# Altium PCB 280049 tester board.PcbDoc
Units mm, origin at the board's own origin, x right, y up, seen from the top; angles counter-clockwise.
Board outline 176.02 x 265.66 mm, 4 copper layers (Top Layer, Layer 1, Layer 2, Bottom Layer), stack 1.57 mm thick; 108 components, 81 nets, 439 pads, 40 vias.
Unrouted connection lines stored in the file: 13.
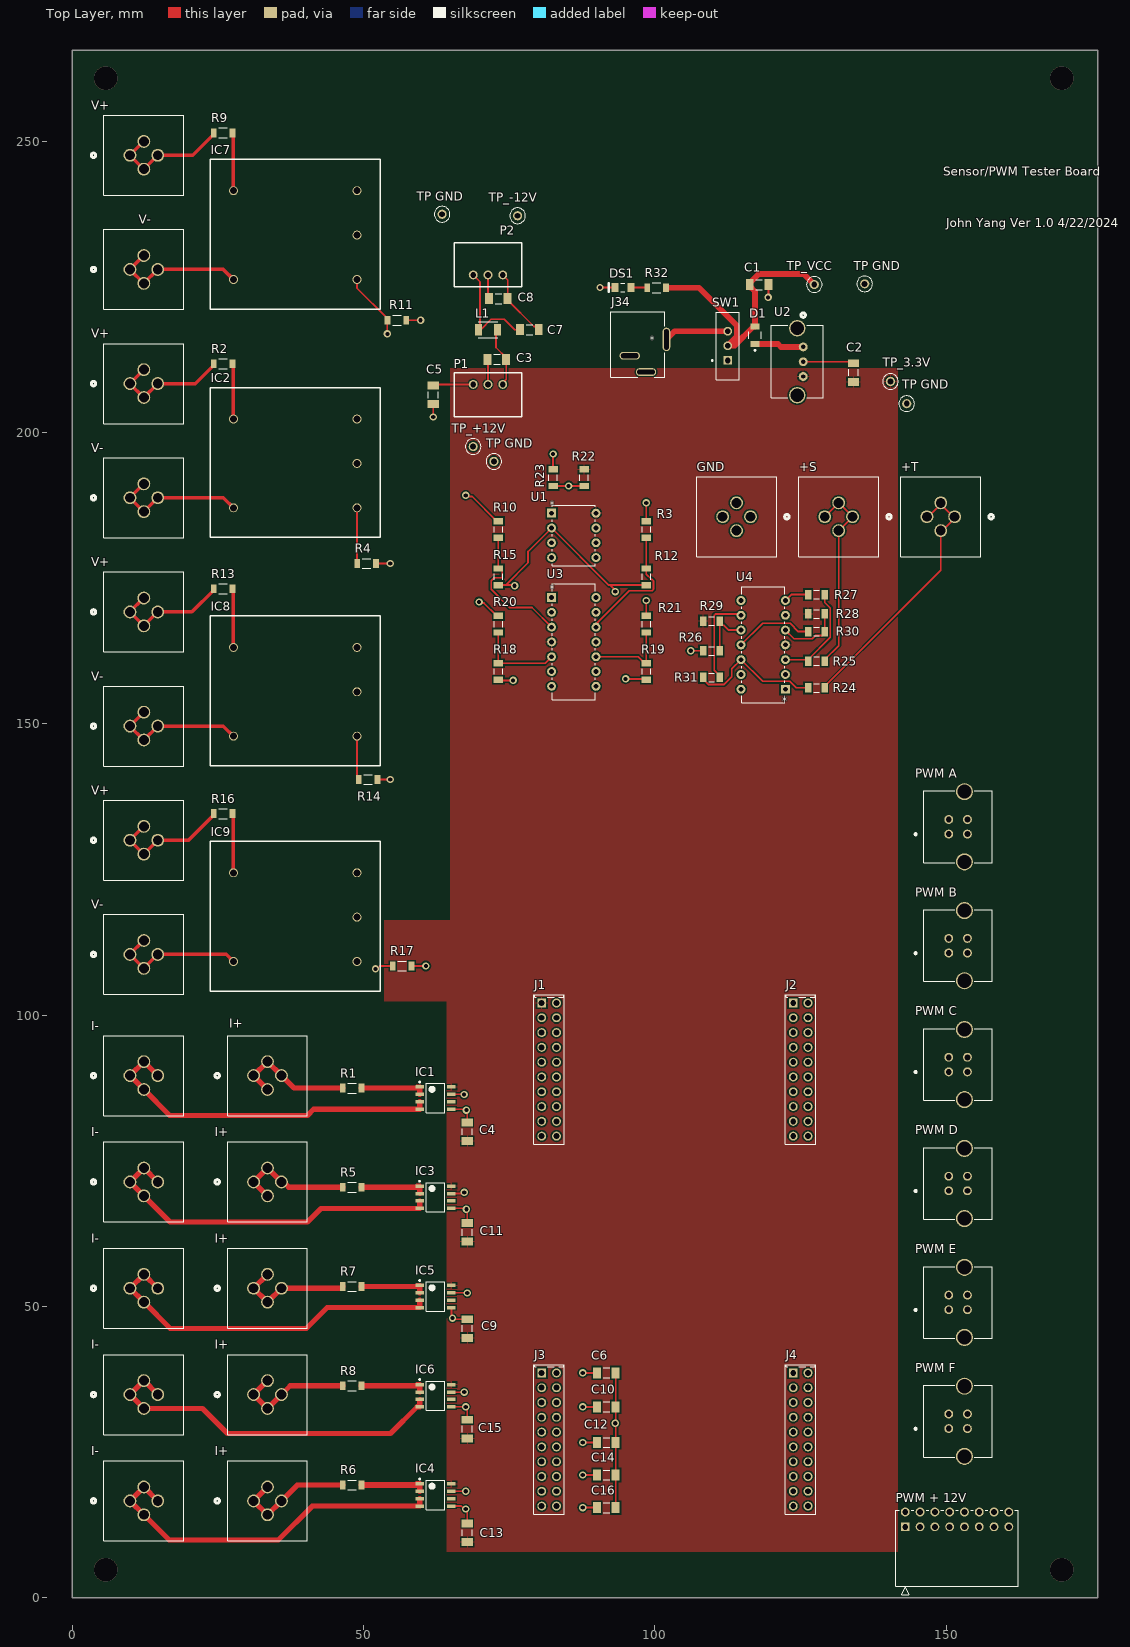
[diagram p0: Top Layer view]
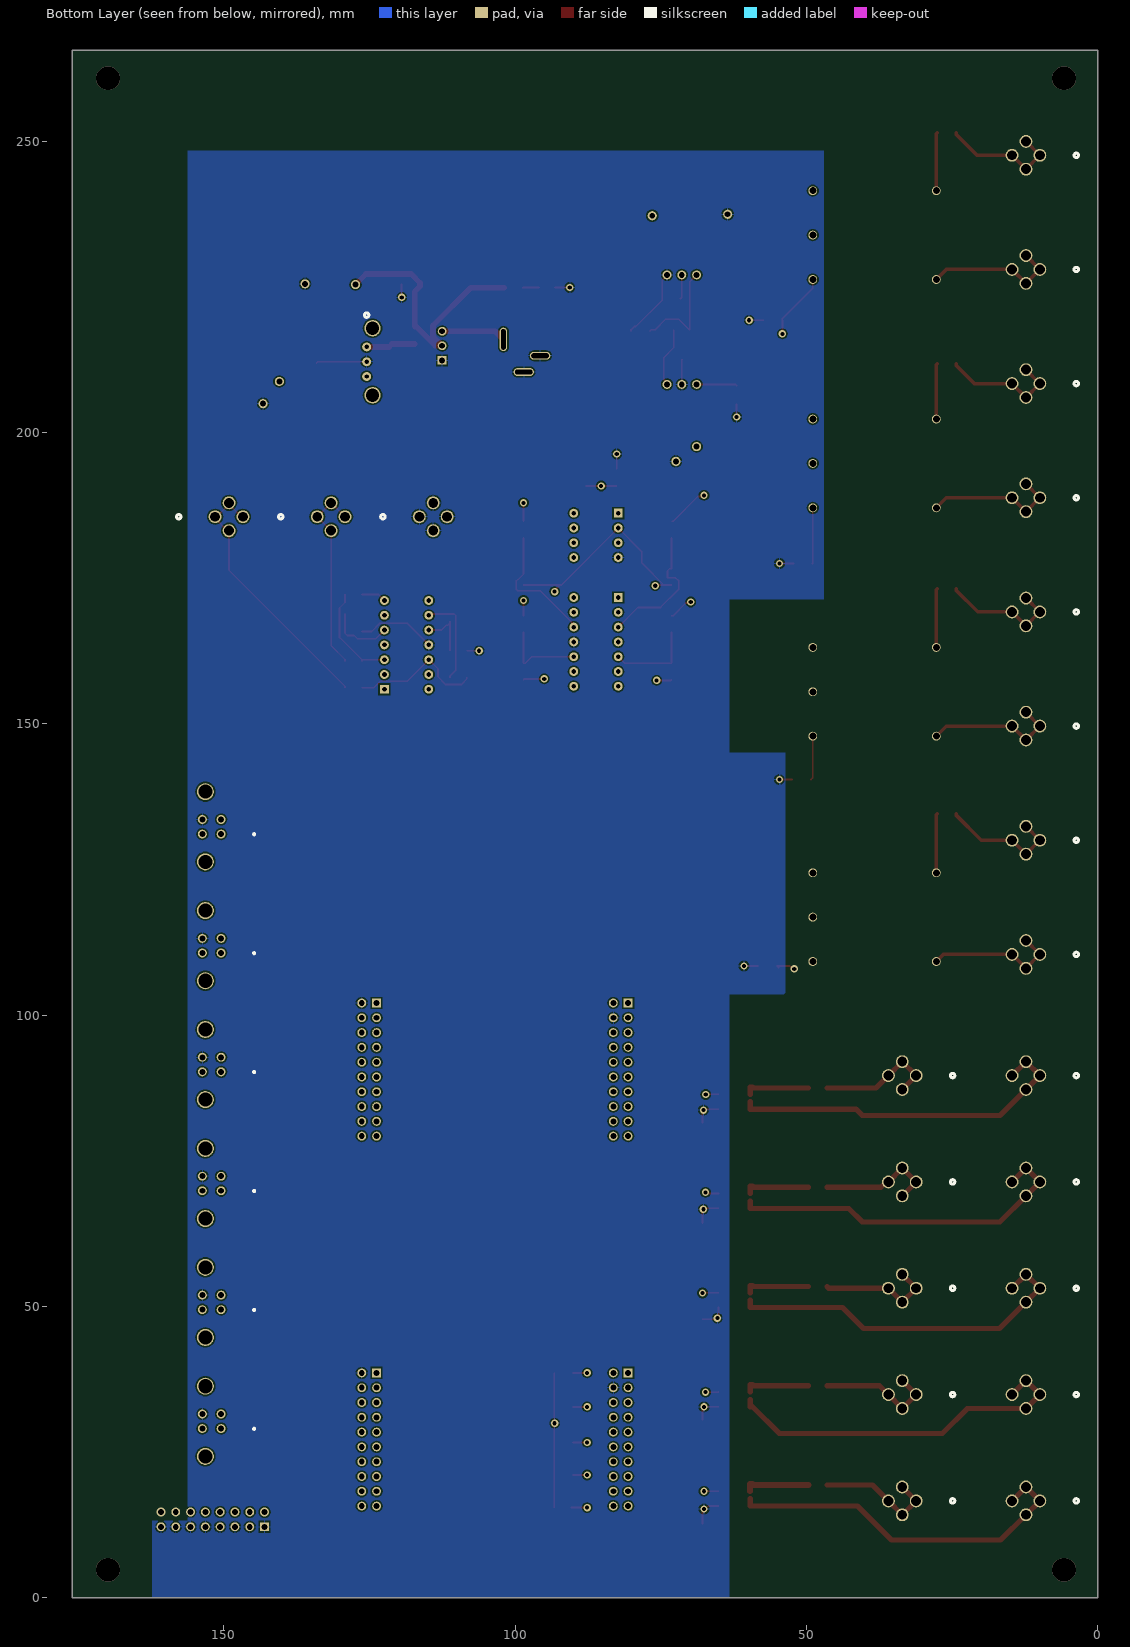
[diagram p1: Bottom Layer view, seen from below]
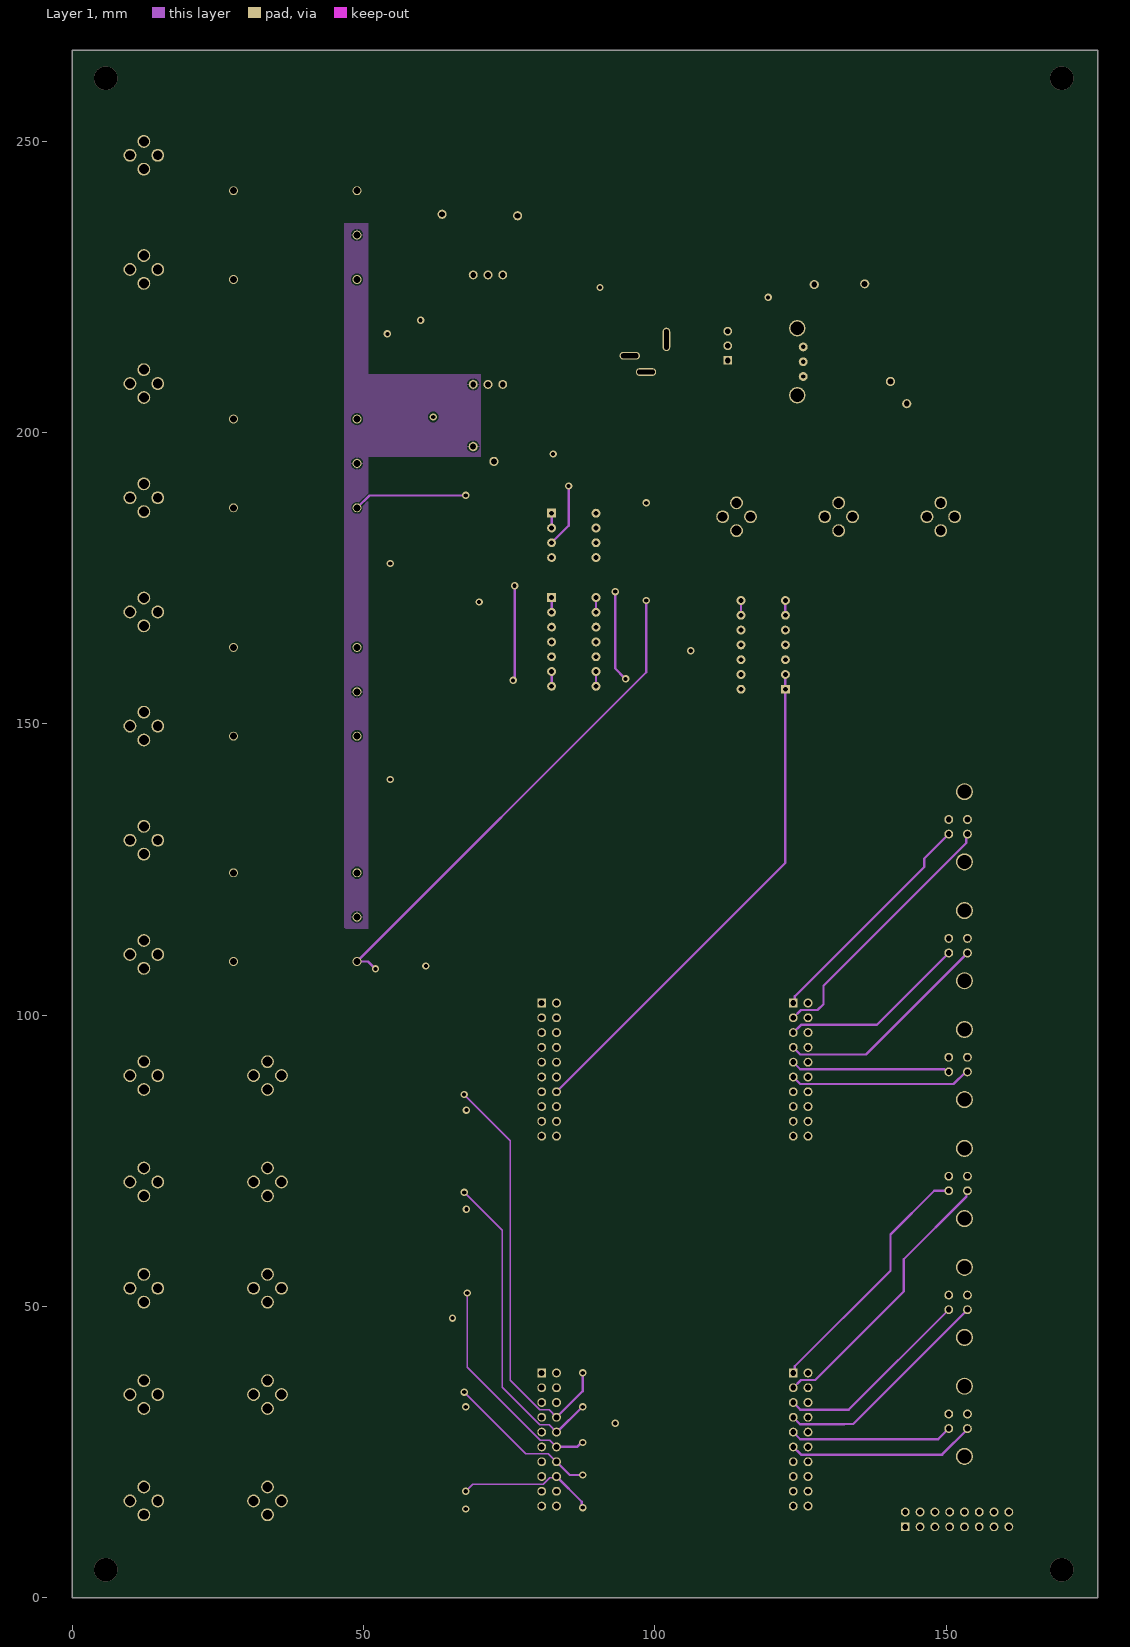
[diagram p2: Layer 1]
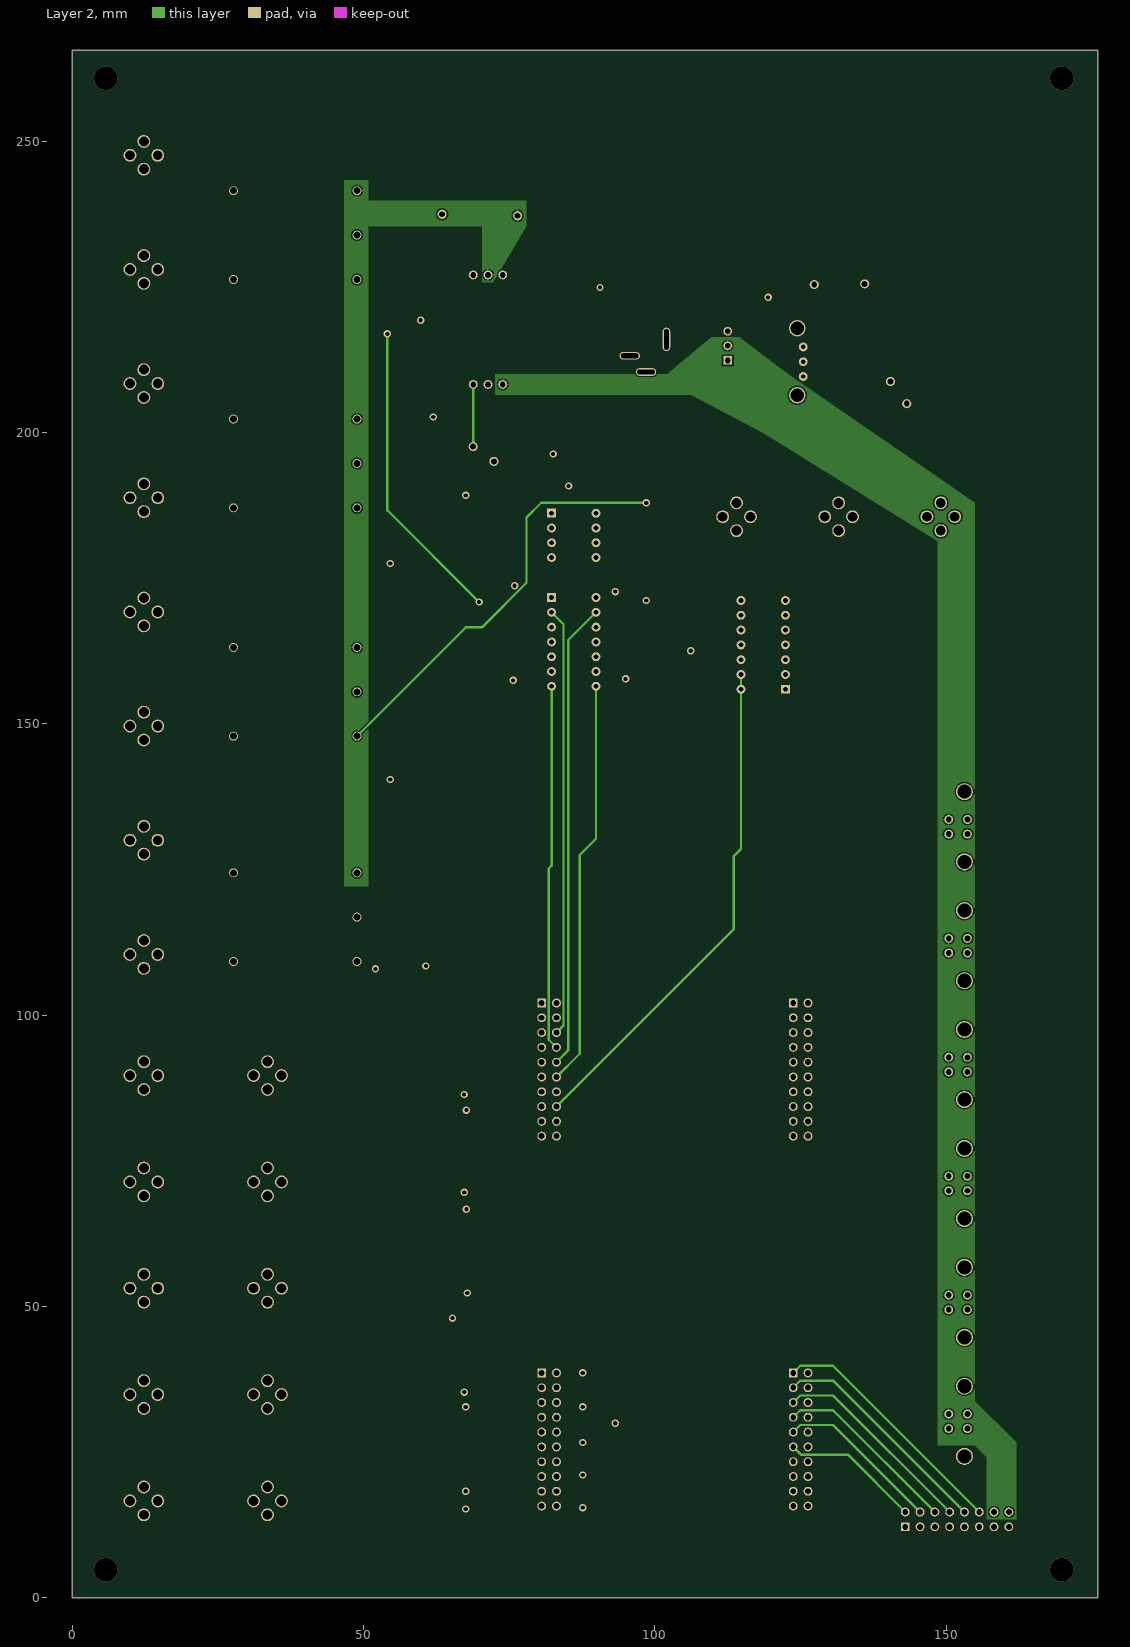
[diagram p3: Layer 2]

## Layer stack, top to bottom
Top Solder: solder mask 0.0305, Solder Resist, Dk 3.8
Top Layer: signal copper 0.035
Dielectric 2: prepreg 0.2, PP-006, Dk 4.4
Layer 1: signal copper 0.0175
Dielectric 1: dielectric 1.065, FR-4, Dk 4.6
Layer 2: signal copper 0.0175
Dielectric 3: prepreg 0.2, PP-006, Dk 4.4
Bottom Layer: signal copper 0.035
Bottom Solder: solder mask 0.0305, Solder Resist, Dk 3.8

## Board outline
0,0 176.022,0 176.022,265.659 0,265.659

## Design rules (kind name [scope] priority, off if disabled: settings)
Clearance [All] p1: gap=0.254 ignorepadtopadclearanceinfootprint=FALSE
PolygonConnect [All] p1: connectstyle=Relief reliefconductorwidth=0.254 reliefentries=4 polygonreliefangle="90 Angle" airgapwidth=0.254
RoutingVias [All] p1: holewidth=0.711 width=1.27 viastyle="Through Hole" minholewidth=0.711 minwidth=1.27 maxholewidth=0.711 maxwidth=1.27
SilkToSolderMaskClearance [IsPad] p1: minsilkscreentomaskgap=0.127 clearancetoexposedcopper=TRUE
SolderMaskExpansion [All] p1: expansion=0.102 istentingtop=FALSE
Width [All] p1: maxlimit=1 minlimit=0.254 preferedwidth=0.4 toplayer_prefwidth=0.3 bottomlayer_prefwidth=0.3 minimp=50.000000 maximp=50.000000 favimp=50.000000
29 further rules are at their usual default settings.

## Components (designator, comment, footprint, x,y, rotation, side; value= is the part's Value field where it differs from the comment)
+S "CT3151V1-0" CON4_CT3151V1-0_CTE#1 133.96,185.572 r180 top (schematic designator J39)
+T "CT3151V1-0" CON4_CT3151V1-0_CTE#2 151.486,185.572 r180 top (schematic designator J33)
C1 "1206" CAPC1206(3216)130_M 117.907,225.425 r0 top value=47nF
C2 "1206" CAPC1206(3216)130_M 134.112,210.312 r270 top value=47nF
C3 "1206" CAPC1206(3216)130_M 72.898,212.598 r0 top value=47nF
C4 "47nF 1206" CAPC1206(3216)130_M 67.818,80.01 r270 top value=47nF
C5 "1206" CAPC1206(3216)130_M 61.976,206.502 r270 top value=47nF
C6 "1206" CAPC1206(3216)130_M 91.694,38.608 r0 top value=47nF
C7 "1206" CAPC1206(3216)130_M 78.486,217.678 r0 top value=47nF
C8 "1206" CAPC1206(3216)130_M 73.152,223.012 r0 top value=47nF
C9 "47nF 1206" CAPC1206(3216)130_M 67.818,46.228 r270 top value=47nF
C10 "1206" CAPC1206(3216)130_M 91.694,32.766 r0 top value=47nF
C11 "47nF 1206" CAPC1206(3216)130_M 67.818,62.738 r270 top value=47nF
C12 "1206" CAPC1206(3216)130_M 91.694,26.67 r0 top value=47nF
C13 "47nF 1206" CAPC1206(3216)130_M 67.818,11.176 r270 top value=47nF
C14 "1206" CAPC1206(3216)130_M 91.694,21.082 r0 top value=47nF
C15 "47nF 1206" CAPC1206(3216)130_M 67.818,28.956 r270 top value=47nF
C16 "1206" CAPC1206(3216)130_M 91.694,15.494 r0 top value=47nF
D1 "1206 D" FP-SD1206S-MFG 117.221,216.738 r90 top value=115pF
DS1 "1206 LED" LUMX-SML-LX1206YC-TR_V 94.539,224.917 r180 top
GND "CT3151V1-0" CON4_CT3151V1-0_CTE#1 116.434,185.572 r180 top (schematic designator J41)
I+ "CT3151V1-0" CON4_CT3151V1-0_CTE#1 31.144,16.642 r0 top (schematic designator J23)
I+ "CT3151V1-0" CON4_CT3151V1-0_CTE#1 31.144,34.892 r0 top (schematic designator J21)
I+ "CT3151V1-0" CON4_CT3151V1-0_CTE#1 31.144,53.142 r0 top (schematic designator J19)
I+ "CT3151V1-0" CON4_CT3151V1-0_CTE#1 31.144,71.392 r0 top (schematic designator J17)
I+ "CT3151V1-0" CON4_CT3151V1-0_CTE#1 31.144,89.642 r0 top (schematic designator J5)
I- "CT3151V1-0" CON4_CT3151V1-0_CTE#1 9.915,16.642 r0 top (schematic designator J24)
I- "CT3151V1-0" CON4_CT3151V1-0_CTE#1 9.915,34.892 r0 top (schematic designator J22)
I- "CT3151V1-0" CON4_CT3151V1-0_CTE#1 9.915,53.142 r0 top (schematic designator J20)
I- "CT3151V1-0" CON4_CT3151V1-0_CTE#1 9.915,71.392 r0 top (schematic designator J18)
I- "CT3151V1-0" CON4_CT3151V1-0_CTE#1 9.915,89.642 r0 top (schematic designator J6)
IC1 "MLX91221KDC-ABR-020-RE" MLX91221KDC-ABR-020-RE 62.374,85.788 r0 top
IC2 "LV-20P" LV-20P 31.496,195.227 r90 top
IC3 "MLX91221KDC-ABR-020-RE" MLX91221KDC-ABR-020-RE 62.374,68.756 r0 top
IC4 "MLX91221KDC-ABR-020-RE" MLX91221KDC-ABR-020-RE 62.374,17.659 r0 top
IC5 "MLX91221KDC-ABR-020-RE" MLX91221KDC-ABR-020-RE 62.374,51.723 r0 top
IC6 "MLX91221KDC-ABR-020-RE" MLX91221KDC-ABR-020-RE 62.374,34.691 r0 top
IC7 "LV-20P" LV-20P 31.496,234.42 r90 top
IC8 "LV-20P" LV-20P 31.496,156.035 r90 top
IC9 "LV-20P" LV-20P 31.496,117.348 r90 top
J1 "1-826656-0" CON20_2X10_P100UM_HDR_TYC 80.594,102.108 r270 top
J2 "1-826656-0" CON20_2X10_P100UM_HDR_TYC 123.774,102.108 r270 top
J3 "1-826656-0" CON20_2X10_P100UM_HDR_TYC 80.594,38.608 r270 top
J4 "1-826656-0" CON20_2X10_P100UM_HDR_TYC 123.774,38.608 r270 top
J34 "KLDVX-0202-A" JACK_KLDVX-0202_KYC 97.104,215.113 r0 top
L1 "1210" TDK-NLV32-PF_V 71.374,217.678 r0 top
P1 "lms78_12-0.5r" lms78_12-0.5r 76.031,209.391 r180 top
P2 "lms78_12-0.5r" lms78_12-0.5r 66.717,225.965 r0 top
"PWM + 12V" "PPPC082LJBN-RC" CONN_PPPC082LJBN-RC_SUL 143.002,12.192 r180 top (schematic designator J40)
"PWM A" "PWM A" CONN4_5787834-1_TEC 153.675,133.604 r90 top (schematic designator J7)
"PWM B" "PWM B" CONN4_5787834-1_TEC 153.675,113.194 r90 top (schematic designator J8)
"PWM C" "PWM C" CONN4_5787834-1_TEC 153.675,92.783 r90 top (schematic designator J9)
"PWM D" "PWM D" CONN4_5787834-1_TEC 153.675,72.373 r90 top (schematic designator J12)
"PWM E" "PWM E" CONN4_5787834-1_TEC 153.675,51.963 r90 top (schematic designator J13)
"PWM F" "PWM F" CONN4_5787834-1_TEC 153.675,31.552 r90 top (schematic designator J14)
R1 "RC1206JR-070RL" FP-RC1206-MFG 48.04,87.5 r0 top value=0Ω
R2 "RC1206JR-070RL" FP-RC1206-MFG 25.908,211.836 r0 top value=0Ω
R3 "1206" RESC3216X70X50NL05T20 98.552,183.388 r90 top
R4 "RC1206JR-070RL" FP-RC1206-MFG 50.546,177.546 r0 top value=0Ω
R5 "RC1206JR-070RL" FP-RC1206-MFG 48.04,70.468 r0 top value=0Ω
R6 "RC1206JR-070RL" FP-RC1206-MFG 48.04,19.371 r0 top value=0Ω
R7 "RC1206JR-070RL" FP-RC1206-MFG 48.04,53.436 r0 top value=0Ω
R8 "RC1206JR-070RL" FP-RC1206-MFG 48.04,36.403 r0 top value=0Ω
R9 "RC1206JR-070RL" FP-RC1206-MFG 25.908,251.46 r0 top value=0Ω
R10 "1206" RESC3216X70X50NL05T20 73.152,183.388 r270 top
R11 "RC1206JR-070RL" FP-RC1206-MFG 55.753,219.304 r0 top value=0Ω
R12 "1206" RESC3216X70X50NL05T20 98.552,175.26 r90 top
R13 "RC1206JR-070RL" FP-RC1206-MFG 25.908,173.228 r0 top value=0Ω
R14 "RC1206JR-070RL" FP-RC1206-MFG 50.8,140.462 r0 top value=0Ω
R15 "1206" RESC3216X70X50NL05T20 73.152,175.26 r90 top
R16 "RC1206JR-070RL" FP-RC1206-MFG 25.908,134.62 r0 top value=0Ω
R17 "RC1206JR-070RL" FP-RC1206-MFG 56.642,108.458 r0 top value=0Ω
R18 "1206" RESC3216X70X50NL05T20 73.152,159.004 r270 top
R19 "1206" RESC3216X70X50NL05T20 98.552,159.004 r270 top
R20 "1206" RESC3216X70X50NL05T20 73.152,167.132 r270 top
R21 "1206" RESC3216X70X50NL05T20 98.552,167.132 r90 top
R22 "1206" RESC3216X70X50NL05T20 87.884,192.278 r270 top
R23 "1206" RESC3216X70X50NL05T20 82.55,192.278 r270 top
R24 "1206" RESC3216X70X50NL05T20 127.762,156.21 r0 top
R25 "1206" RESC3216X70X50NL05T20 127.762,160.782 r180 top
R26 "1206" RESC3216X70X50NL05T20 109.728,157.988 r180 top
R27 "1206" RESC3216X70X50NL05T20 127.762,172.212 r0 top
R28 "1206" RESC3216X70X50NL05T20 127.762,168.91 r0 top
R29 "1206" RESC3216X70X50NL05T20 109.728,167.64 r0 top
R30 "1206" RESC3216X70X50NL05T20 127.762,165.862 r0 top
R31 "1206" RESC3216X70X50NL05T20 109.728,162.56 r0 top
R32 "1206R" FP-RC1206-MFG 100.305,224.892 r180 top value=0Ω
SW1 "EG1218" ESWI-EG1218_V 112.522,214.915 r90 top
"TP GND" "5004" FP-5004-MFG 143.256,204.978 r270 top (schematic designator J32)
"TP GND" "5004" FP-5004-MFG 136.042,225.552 r270 top (schematic designator J31)
"TP GND" "5004" FP-5004-MFG 63.5,237.49 r270 top (schematic designator J28)
"TP GND" "5004" FP-5004-MFG 72.39,195.072 r270 top (schematic designator J27)
TP_3.3V "5004" FP-5004-MFG 140.462,208.788 r270 top (schematic designator J11)
TP_+12V "5004" FP-5004-MFG 68.834,197.612 r270 top (schematic designator J30)
TP_-12V "5004" FP-5004-MFG 76.454,237.236 r270 top (schematic designator J29)
TP_VCC "5004" FP-5004-MFG 127.381,225.425 r270 top (schematic designator J10)
U1 "OP284EPZ" N_8_ADI 82.296,186.182 r0 top
U2 "TSR 1-4833WI" TSR1WI-SINGLE_TRP 125.476,214.719 r270 top
U3 "OP484FPZ" N_14_ADI 82.296,171.704 r0 top
U4 "OP484FPZ" N_14_ADI 122.428,155.956 r180 top
V+ "CT3151V1-0" CON4_CT3151V1-0_CTE#1 9.915,130.038 r0 top (schematic designator J37)
V+ "CT3151V1-0" CON4_CT3151V1-0_CTE#1 9.915,169.23 r0 top (schematic designator J35)
V+ "CT3151V1-0" CON4_CT3151V1-0_CTE#1 9.915,247.615 r0 top (schematic designator J25)
V+ "CT3151V1-0" CON4_CT3151V1-0_CTE#1 9.915,208.423 r0 top (schematic designator J15)
V- "CT3151V1-0" CON4_CT3151V1-0_CTE#1 9.915,110.442 r0 top (schematic designator J38)
V- "CT3151V1-0" CON4_CT3151V1-0_CTE#1 9.915,149.634 r0 top (schematic designator J36)
V- "CT3151V1-0" CON4_CT3151V1-0_CTE#1 9.915,228.019 r0 top (schematic designator J26)
V- "CT3151V1-0" CON4_CT3151V1-0_CTE#1 9.915,188.827 r0 top (schematic designator J16)

## Footprints (in the part's own frame and the unit in brackets; to place one, negate y for a bottom-side part, rotate by r counter-clockwise, add the part's x,y. Pads: shape width x height; smd on the part's side, far side on the other; paste and mask are expansions set on the pad)
CAPC1206(3216)130_M [mm] "Chip Capacitor, Body 3.2x1.6mm, Height 1.3mm, IPC Low Density"
  rect 1.35x1.9 smd: 1(-1.6,0) 2(1.6,0)
  silkscreen extent -0.55,-0.85 0.55,0.85, body extent -1.7,-0.9 1.7,0.9, height 1.3
CON4_CT3151V1-0_CTE#1 [mil]
  round 87 hole 67 paste-99999 mask+5.91: 1(0,0) 2(188,0) 3(94,94) 4(94,-94)
  silkscreen extent -261,-270 364,270
CON4_CT3151V1-0_CTE#2 [mil]
  round 87 hole 67 paste-99999 mask+5.91: 1(0,0) 2(188,0) 4(94,-94)
  round 87 hole 67.01 paste-99999 mask+5.91: 3(94,94)
  silkscreen extent -261,-270 364,270
CON20_2X10_P100UM_HDR_TYC [mil]
  rect 60x60 hole 40 paste-99999 mask+3.94: 1(0,0)
  round 60 hole 40 paste-99999 mask+3.94: 2(0,100) 3(100,0) 4(100,100) 5(200,0) 6(200,100) 7(300,0) 8(300,100) 9(400,0) 10(400,100) 11(500,0) 12(500,100) 13(600,0) 14(600,100) 15(700,0) 16(700,100) 17(800,0) 18(800,100) 19(900,0) 20(900,100)
  silkscreen extent -55,-54 955,154, body extent -50,-50 950,150, height 374
CONN4_5787834-1_TEC [mil]
  round 60 hole 40 paste-99999 mask+3.94: 1(0,126.38) 2(-98.43,126.38) 3(-98.43,0) 4(0,0)
  round 115 hole 95 paste-99999 mask+3.94: 5(-286.21,20.19) 6(187.79,20.19)
  silkscreen extent -291,-167 193,354
CONN_PPPC082LJBN-RC_SUL [mil]
  rect 60x60 hole 40 paste-99999 mask+3.94: 1(0,0)
  round 60 hole 40 paste-99999 mask+3.94: 2(0,-100) 3(-100,0) 4(-100,-100) 5(-200,0) 6(-200,-100) 7(-300,0) 8(-300,-100) 9(-400,0) 10(-400,-100) 11(-500,0) 12(-500,-100) 13(-600,0) 14(-600,-100) 15(-700,0) 16(-700,-100)
  silkscreen extent -765,-113 65,458
ESWI-EG1218_V [mm] "THD, 3-Leads, Body 11.6x4mm, Pitch 2.5mm"
  rect 1.5x1.5 hole 1: 1(-2.5,0)
  round 1.5 hole 1: 2(0,0) 3(2.5,0)
  silkscreen extent -5.8,-2 5.8,2.77, body extent -5.8,-2 5.8,2, height 7.4
FP-5004-MFG [mm]
  round 1.57 hole 1.02 paste-2539.97 mask+0.1: 1(0,0)
  silkscreen extent -1.34,-1.35 1.34,1.35, body extent -1.45,-1.45 1.45,1.45, height 0.25
FP-RC1206-MFG [mm]
  rect 1x1.5 smd paste+0 mask+0: 1(-1.6,0) 2(1.6,0)
  silkscreen extent -0.72,-0.85 0.72,0.85, body extent -2.2,-0.95 2.2,0.95, height 0.25
FP-SD1206S-MFG [mm]
  rect 1x1.5 smd paste+0 mask+0: 1(-1.5,0) 2(1.5,0)
  silkscreen extent -2.72,-1.05 0.63,1.05, body extent -2.1,-1.15 2.1,1.15, height 0.25
JACK_KLDVX-0202_KYC [mil]
  oval 52x158 hole 32.01 slot 138 at 90 deg paste+0 mask+3.94: 1(192.91,35.4)
  oval 138x52 hole 32 slot 118 at 0 deg paste-99999 mask+3.94: 2(55.12,-185.07) 3(-55.12,-74.84)
  silkscreen extent -182,-222 182,222
lms78_12-0.5r [mil]
  round 60 hole 39.37: 1(83.35,43.74) 2(183.35,43.74) 3(283.35,43.74)
  silkscreen extent -45,-35 412,262
LUMX-SML-LX1206YC-TR_V [mm] "SMD, 2-Leads, Body 3.2x1.5mm"
  rect 1.2x1.5 smd: 1(-1.35,0) 2(1.35,0)
  silkscreen extent -0.35,-0.75 2.45,0.75, body extent -1.6,-0.75 1.6,0.75, height 1.25
LV-20P [mil]
  round 60 hole 47.24: 1(-320,150) 2(280,150) 3(-320,-685) 4(-20,-685) 5(280,-685)
  silkscreen extent -520,-842 493,307
MLX91221KDC-ABR-020-RE [mm] "SOIC, 8-Leads, Body 4.89x3.90mm, Pitch 1.27mm, IPC Medium Density"
  rect 1.45x0.6 smd: 1(-2.725,1.905) 2(-2.725,0.635) 3(-2.725,-0.635) 4(-2.725,-1.905) 5(2.725,-1.905) 6(2.725,-0.635) 7(2.725,0.635) 8(2.725,1.905)
  silkscreen extent -2.85,-2.5 1.6,2.88, body extent -2,-2.5 2,2.5, height 1.73
N_8_ADI [mil]
  rect 60x60 hole 32 paste-99999 mask+3.94: 1(0,0)
  round 60 hole 32 paste-99999 mask+3.94: 2(0,-100) 3(0,-200) 4(0,-300) 5(300,-300) 6(300,-200) 7(300,-100) 8(300,0)
  silkscreen extent 5,-355 295,55, body extent -5,-350 315,50, height 215
N_14_ADI [mil]
  rect 60x60 hole 32 paste-99999 mask+3.94: 1(0,0)
  round 60 hole 32 paste-99999 mask+3.94: 2(0,-100) 3(0,-200) 4(0,-300) 5(0,-400) 6(0,-500) 7(0,-600) 8(300,-600) 9(300,-500) 10(300,-400) 11(300,-300) 12(300,-200) 13(300,-100) 14(300,0)
  silkscreen extent 5,-692 295,92, body extent -5,-687 315,87, height 215
RESC3216X70X50NL05T20 [mm] "Chip Resistor, 2-Leads, Body 3.20x1.60mm, IPC Medium Density"
  rect 1.1x1.65 smd: 1(-1.425,0) 2(1.425,0)
  silkscreen extent -0.5,-0.72 0.5,0.72, body extent -1.63,-0.82 1.62,0.82, height 0.7
TDK-NLV32-PF_V [mm] "Molded Inductor, 2-Leads, Body 3.4x2.7mm"
  rect 1.2x2 smd: 1(-1.6,0) 2(1.6,0)
  silkscreen extent -1.7,-1.35 1.7,1.35, body extent -1.92,-1.35 1.92,1.35, height 2.4
TSR1WI-SINGLE_TRP [mil]
  round 60 hole 30 paste-99999 mask+3.94: 1(0,0) 2(100,0) 3(200,0)
  round 110 hole 90 paste-99999 mask+3.94: 4(-126.5,-40) 5(326.5,-40)
  silkscreen extent -230,-215 345,135

## Part data
+S +T GND I+ I+ I+ I+ I+ I- I- I- I- I- V+ V+ V+ V+ V- V- V- V-: library part CMP-010-000001-1, "No Description Available", Mfr_Name="CAL TEST ELECTRONICS", Copyright="Copyright (C) 2024 Ultra Librarian. All rights reserved.", Design Item ID=CT3151V1-0, Manufacturer_Part_Number=CT3151V1-0, RefDes=RefDes, Source=CT3151V1-0.SchLib, Type=DEV
C1 C2 C3 C5 C6 C7 C8 C10 C12 C14 C16: library part CMP-1037-04007-1, "CAP 47nF 200V ±10% 1206 (3216 Metric) Thickness 1.3mm SMD", Case-Metric=3216, Rated Voltage="200 V", Tolerance=Â±10%, Case-EIA=1206, Max Thickness="1.3 mm", Technology=SMT
C4 C9 C11 C13 C15: library part CMP-1037-04007-1, "CAP 47nF 200V ±10% 1206 (3216 Metric) Thickness 1.3mm SMD", Case-EIA=1206, Case-Metric=3216, Rated Voltage="200 V", Tolerance=Â±10%, Max Thickness="1.3 mm", Technology=SMT
D1: library part CMP-04549-000002-1, "DIODE SCHOTTKY 40V 2A 1206", Capacitance=115pF, Forward Current=2A, Manufacturer=AVX, Manufacturer Part Number=SD1206S040S2R0, Max Repetitive Reverse Voltage=40V, Max Surge Forward Current=40A, Package=SD1206S, Peak Reverse Current=0.03mA, Temperature="-55°C to +125°C", Temperature Range High=+125°C, Temperature Range Low=-55°C, Automotive=No, Category=Diode, ComponentLink2Description=Datasheet, ComponentLink2URL=http://datasheets.avx.com/schottky.pdf, Device Class L1="Discrete Semiconductors", Device Class L2=Diodes, Device Class L3="Schottky Diodes", Digikey Description="DIODE SCHOTTKY 40V 2A 1206", Height=1.16mm, Lead Free=Yes, Mouser Description="Small Signal Schottky Diode, Single, 40 V, 2 A, 500 Mv, 40 A, 125 C Rohs Compliant: Yes", Octopart=https://octopart.com/sd1206s040s2r0-avx-24931771, RoHS=TRUE
DS1: library part CMP-2000-07124-1, "Yellow LED, Water Clear Len, 585 nm, 2.1 V, -40 to 85 degC, 2-Pin SMD, RoHS, Tape and Reel", Color=Yellow, Current - Test=20mA, Lens Color=Colorless, Manufacturer=Lumex, Millicandela Rating=6mcd, Package / Case=1206(3216Metric), Package Description="2-Pin Surface Mount Device, Body 3.2 x 1.5 mm", Package Reference=SML-LX1206YC-TR, Standard Package=3,000, Supplier Device Package=1206, Voltage - Forward (Vf) (Typ)=2.1V, Catalog Drawings=SML-LX1206SeriesTopSML-LX1206SeriesSideSML-LX1206SeriesBottomSML-LX1206SeriesFootprint, Category=Optoelectronics, Datasheet URL=http://www.lumex.com/content/files/ProductAttachment/SML-LX1206YC-TR.pdf, Datasheet Version="Rev. K, 08/2012", Family=LEDIndication-Discrete, Features=-, Height (Max)=1.10mm, Lens Style/Size=RectanglewithFlatTop, Lens Transparency=Clear, Manufacturer URL=http://www.lumexinstruments.com/, Mounting Technology=SurfaceMount, Mounting Type=SurfaceMount, Online Catalog=SML-LX1206RectanglewithFlatTop1206PackageLEDs, Other Names=67-1358-2LU60357TRSMLLX1206YCTR, Packaging=Tape&Reel(TR), Product Training Modules=LEDsBenefitsofCustomLEDandLCDTechnology, RoHS Information=RoHSCertofCompliance, Series=-, Size / Dimension=3.20mmLx1.60mmW, Viewing Angle=160°, Wavelength - Dominant=-, Wavelength - Peak=585nm
IC1 IC3 IC4 IC5 IC6: library part CMP-031-00006-1, ".088 W", Design Item ID=MLX91221KDC-ABR-020-RE, Source=MLX91221KDC-ABR-020-RE.SchLib
IC2 IC7 IC8 IC9: "0.15 W"
J1 J2 J3 J4: library part CMP-012-000003-1, "No Description Available", Mfr_Name="TE Connectivity", Design Item ID=1-826656-0, RefDes=RefDes, Source=1-826656-0.SchLib, Type=Type
J34: "No Description Available", Mfr_Name="KYCON, INC.", RefDes=RefDes, Type="Power Connectors"
L1: library part CMP-2000-06854-1, "Wire Wound Inductor, 1 uH, +/- 5%, -40 to 105 degC, 2-Pin Molded, RoHS, Tape and Reel", Current Rating=400mA, DC Resistance (DCR)=700mOhmMax, Frequency - Self Resonant=120MHz, Frequency - Test=7.96MHz, Inductance=1µH, Manufacturer=TDK, Operating Temperature=-40°C~105°C, Package / Case=1210(3225Metric), Package Description="2-Pin Surface Mount Device, Body 3.2 x 2.5 mm", Package Reference=NLV32-PF, Q @ Freq=30@7.96MHz, Standard Package=1, Tolerance=±5%, Catalog Drawings="NLV32T,NLCV32TSeriesTop /  / NLV32T,NLCV32TSeriesSide /  / NLV32T,NLCV32TSeriesEnd", Category=Inductors,Coils,Chokes, Datasheet URL=https://product.tdk.com/info/en/catalog/datasheets/inductor_commercial_standard_nlv32-pf_en.pdf, Datasheet Version=09/2016, Dynamic Catalog=NLVSeries, Family=FixedInductors, Manufacturer URL=http://www.tdk.com/, Mounting Technology=SurfaceMount, Mounting Type=SurfaceMount, Other Names=445-1517-1, Packaging=CutTape(CT), Product Training Modules=SMDInductors, Series=NLV, Shielding=Unshielded, Size / Dimension="0.126\"Lx0.079\"Wx0.086\"H(3.20mmx2.50mmx2.20mm)"
"PWM + 12V": "No Description Available", Mfr_Name=Sullins, RefDes=RefDes, Type=Type
"PWM A" "PWM B" "PWM C" "PWM D" "PWM E" "PWM F": library part CONN_USB_TypeB, "USB TYPE B SINGLE VERTICAL", Color=Black, Contact Current Rating=1A, Flammability Rating="UL94 V-0", Insulation Resistance=1GR, Manufacturer="Adam Tech", Max Operating Temperature=185°C, Min Operating Temperature=-67°C, Package Quantity=144, Supplier Part Number 1=USB-B-S-VT, Voltage Rating=30V, Category="Audio / Video Connectors", Circuit Application=Signal, ComponentLink9Description="New link", ComponentLink9URL=https://www.digikey.com/en/products/detail/adam-tech/USB-B-S-VT/9829305?s=N4IgTCBcDa4AwFYDsBaAqgZQEIpxlAagCooByAIiALoC%2BQA, Connector System=Cable-to-Board, Connector Type=Receptacle, Contact Material="Copper Alloy,Copper", Contact Plating=Gold, Current Rating=1A, Depth=11.46mm, ELV=Compliant, Gender=Receptacle, Housing Color=Black, Housing Material=Thermoplastic, Insulation Color=Black, Lead Free="Lead Free", Length=12.03mm, Mount="Through Hole,Vertical", Number of Contacts=4, Number of Ports=1, Number of Positions=4, Number of Terminals/Pins=4, Orientation=Vertical, Packaging=Tray, PCB Thickness=1.57mm, Pitch=2.5mm, Plating=Bright,Tin, Plating Thickness=0.76um, Pricing 1="1=2.22000, 10=2.13000, 25=1.95280, 40=1.86400, 144=1.77521, 288=1.55333, 576=1.50894, 1008=1.33143 (USD)", Pricing 2="1=0.80860, 10=0.70270, 25=0.63690, 40=0.59390, 100=0.56400, 300=0.51060, 500=0.50550, 1000=0.43830 (USD)", Radiation Hardening=No, REACH SVHC="No SVHC", RoHS=Yes, RoHS Compliant=Yes, Series=B, Stock 1=1592, Stock 2=965, Supplier 1="Arrow Electronics", Tail Length=3.01mm, Termination="Through Hole", USB Standard="USB 2.0", Voltage Rating (AC)=30V
R1 R2 R4 R5 R6 R7 R8 R9 R11 R13 R14 R16 R17: library part CMP-2100-03681-2, "RES SMD 0 OHM JUMPER 1/4W 1206", Manufacturer=YAGEO, Package=RC1206, Power Rating=0.25W, Resistance=0Ω, Temperature="-55°C to +155°C", Temperature Coefficient=300ppm/°C, Temperature Range High=+155°C, Temperature Range Low=-55°C, Tolerance=5%, Voltage Rating=200V, Automotive=No, Category=Res, ComponentLink2Description=Datasheet, ComponentLink2URL=https://www.yageo.com/upload/media/product/productsearch/datasheet/rchip/PYu-RC_Group_51_RoHS_L_10.pdf, Composition="Thick Film", Device Class L1="Passive Components", Device Class L2=Resistors, Device Class L3="Chip SMD Resistors", Digikey Description="RES SMD 0 OHM JUMPER 1/4W 1206", Footprint Url=https://www.yageo.com/upload/website/yageo_PYu-R_Mount_10_19050818_343.pdf, Height=0.65mm, Ipc Land Pattern Name=RESC310160X55, Lead Free=Yes, Manufacturer Part Number=RC1206JR-070RL, Mouser Description="Resistor: thick film; SMD; 1206; 0O; 0.25W; ±5%; -55÷155°C", Octopart=https://octopart.com/rc1206jr-070rl-yageo-40025601, RoHS=TRUE, Series=RC
R3 R10 R12 R15 R18 R19 R20 R21 R22 R23 R24 R25 R26 R27 R28 R29 R30 R31: library part CMP-2003-00541-1, Manufacturer=Panasonic, Part Number=ERJ-8GEY0R00V
R32: library part CMP-2100-03681-2, "RES SMD 0 OHM JUMPER 1/4W 1206", Manufacturer=YAGEO, Manufacturer Part Number=RC1206JR-070RL, Package=RC1206, Power Rating=0.25W, Resistance=0Ω, Temperature="-55°C to +155°C", Temperature Coefficient=300ppm/°C, Temperature Range High=+155°C, Temperature Range Low=-55°C, Tolerance=5%, Voltage Rating=200V, Automotive=No, Category=Res, ComponentLink2Description=Datasheet, ComponentLink2URL=https://www.yageo.com/upload/media/product/productsearch/datasheet/rchip/PYu-RC_Group_51_RoHS_L_10.pdf, Composition="Thick Film", Device Class L1="Passive Components", Device Class L2=Resistors, Device Class L3="Chip SMD Resistors", Digikey Description="RES SMD 0 OHM JUMPER 1/4W 1206", Footprint Url=https://www.yageo.com/upload/website/yageo_PYu-R_Mount_10_19050818_343.pdf, Height=0.65mm, Ipc Land Pattern Name=RESC310160X55, Lead Free=Yes, Mouser Description="Resistor: thick film; SMD; 1206; 0O; 0.25W; ±5%; -55÷155°C", Octopart=https://octopart.com/rc1206jr-070rl-yageo-40025601, RoHS=TRUE, Series=RC
SW1: library part CMP-1696-00002-1, "Slide Switch, 500 V, -20 to 70 degC, 3-Pin THD, RoHS", Case\Package=SOT-23-5, Dropout Voltage="300 mV", Max Input Voltage="8 V", Max Operating Temperature="85 degC", Max Ouput Current="150 mA", Max Power Dissipation="250 mW", Min Input Voltage="4.3 V", Min Operating Temperature="-40 degC", Nominal Output Voltage="3.3 V", Package Quantity=3000, ComponentLink1Description="Manufacturer URL", ComponentLink1URL=http://www.e-switch.ch/en/, ComponentLink2Description=Datasheet, ComponentLink2URL=https://www.e-switch.com/system/asset/product_line/data_sheet/119/EG.pdf, DatasheetVersion=Oct-15, Height="1.3 mm", Length="3 mm", Mount="Surface Mount", Output Current="150 mA", Output Voltage="3.3 V", Outputs=1, PackageDescription="3-Pin Through Hole Device, Body 11.6 x 4 mm, Pitch 2.5 mm", PackageReference=EG1218, Packaging="Tape and Reel", Pins=5, Power Rating="250 mW", Radiation Hardening=No, REACH SVHC="No SVHC", RoHSCompliant=true, Width="1.8 mm"
"TP GND" "TP GND" "TP GND" "TP GND" TP_3.3V TP_+12V TP_-12V TP_VCC: library part CMP-2000-05575-2, "PC TEST POINT MINIATURE YELLOW", Manufacturer=Keystone, Automotive=No, Category=Conn, ComponentLink2Description=Datasheet, ComponentLink2URL=https://www.keyelco.com/product-pdf.cfm?p=1313, Contact Material=Silver, Device Class L1=Connectors, Device Class L2=unset, Device Class L3=unset, Digikey Description="PC TEST POINT MINIATURE YELLOW", Height=4.72mm, Is Female=yes, Lead Free=Yes, Manufacturer Part Number=5004, Mouser Description="TEST POINT PC MINI .040\"D YELLOW", Number of Contacts=1, Octopart=https://octopart.com/5004-keystone-28591, Package=5004, RoHS=TRUE
U1 U3 U4: "No Description Available", Mfr_Name="Analog Devices Inc", RefDes=RefDes, Type=Type
U2: library part CMP-01539-104759532-1, "TSR 1-4833WI DC-DC Converter, POL, Industrial, Encapsulated, 1A, 3.3V Out, 9-72V In", Output Power=3.3W, NexarPartId=104759532

## Via types
v1: diameter 1.27, hole 0.711, Top Layer to Bottom Layer, 36 vias
v2: diameter 4.064, hole 4.064, Top Layer to Bottom Layer, 4 vias

## Nets (pads, with @x,y where several pads share a name; then routed paths per layer and width w, separated by ;. In a path a pad name is that pad's centre, name@x,y a point inside that pad or via, vN(x,y) a via of type N, cw(c..) or ccw(c..) an arc to the next point about the centre after c; other vN are vias at no path point)
+3.3V: C2.2 C4.2 C9.2 C11.2 C13.2 C15.2 IC1.8 IC3.8 IC4.8 IC5.8 IC6.8 J1.1 R22.1 R28.1 R29.1 TP_3.3V.1 U1.8 U2.3 U3.4 U4.4
+12V: C5.1 IC2.4 IC7.4 IC8.4 IC9.4 P1.3 TP_+12V.1 | length 17.6
  Top Layer w0.3: C5.1 62.154,208.28 P1.3
  Layer 2 w0.4: TP_+12V.1 P1.3
+12VDC: "PWM + 12V.14" "PWM + 12V.16" "PWM A.1" "PWM B.1" "PWM C.1" "PWM D.1" "PWM E.1" "PWM F.1" C1.1 C3.2 D1.2 L1.2 P1.1 R32.1 SW1.2 TP_VCC.1 | length 55.6
  Top Layer w0.3: L1.2@72.749,217.678 72.749,214.622 74.498,212.873 C3.2 74.498,209.195 73.914,208.611 P1.1
  Top Layer w1: R32.1 107.594,224.892 114.071,218.415 114.071,216.464 SW1.2@112.596,214.989 ; SW1.2 SW1.2@112.596,214.989 ; TP_VCC.1 125.578,227.228 117.835,227.228 116.307,225.7 C1.1 116.307,225.15 117.221,224.236 D1.2 116.971,218.238 113.722,214.989 SW1.2@112.596,214.989
+EN: +S.1 +S.2 +S.3 +S.4 R25.1 | length 33.5
  Top Layer w0.3: +S.2 +S.4 +S.1 +S.3 131.572,163.442 129.187,161.057 R25.1
+HT: R2.1 V+.1@9.915,208.423 V+.2@14.691,208.423 V+.3@12.303,210.81 V+.4@12.303,206.035 | length 21.3
  Top Layer w0.6: V+.3@12.303,210.81 9.915,208.423 12.303,206.035 14.691,208.423 21.145,208.423 24.308,211.586 R2.1
+HT2: R9.1 V+.1@9.915,247.615 V+.2@14.691,247.615 V+.3@12.303,250.003 V+.4@12.303,245.228 | length 21.5
  Top Layer w0.6: V+.3@12.303,250.003 9.915,247.615 12.303,245.228 14.691,247.615 20.713,247.615 24.308,251.21 R9.1
+HT3: R13.1 V+.1@9.915,169.23 V+.2@14.691,169.23 V+.3@12.303,171.618 V+.4@12.303,166.843 | length 21.5
  Top Layer w0.6: V+.3@12.303,171.618 9.915,169.23 12.303,166.843 14.691,169.23 20.56,169.23 24.308,172.978 R13.1
+HT4: R16.1 V+.1@9.915,130.038 V+.2@14.691,130.038 V+.3@12.303,132.426 V+.4@12.303,127.65 | length 21.8
  Top Layer w0.6: V+.3@12.303,132.426 9.915,130.038 12.303,127.65 14.691,130.038 19.976,130.038 24.308,134.37 R16.1
+T1: +T.1 +T.2 +T.3 +T.4 R24.2 | length 45.3
  Top Layer w0.3: R24.2 129.187,156.485 149.098,176.396 +T.3@149.098,182.931 ; +T.2@146.71,185.318 149.098,187.706 +T.1@151.486,185.318 ; +T.3 149.377,183.185 151.486,185.293 +T.1
-12V: C8.1 IC2.5 IC7.5 IC8.5 IC9.5 P2.2 TP_-12V.1 | length 4.2
  Top Layer w0.3: P2.2 71.374,223.19 C8.1 C8.1@71.628,223.088
-HT: IC2.1 V-.1@9.915,188.827 V-.2@14.691,188.827 V-.3@12.303,191.214 V-.4@12.303,186.439 | length 23.8
  Top Layer w0.6: V-.3@12.303,191.214 9.915,188.827 12.303,186.439 14.691,188.827 25.959,188.827 IC2.1
-HT2: IC7.1 V-.1@9.915,228.019 V-.2@14.691,228.019 V-.3@12.303,230.407 V-.4@12.303,225.631 | length 23.8
  Top Layer w0.6: V-.3@12.303,230.407 9.915,228.019 12.303,225.631 14.691,228.019 25.959,228.019 IC7.1
-HT3: IC8.1 V-.1@9.915,149.634 V-.2@14.691,149.634 V-.3@12.303,152.022 V-.4@12.303,147.247 | length 23.8
  Top Layer w0.6: V-.3@12.303,152.022 9.915,149.634 12.303,147.247 14.691,149.634 25.959,149.634 IC8.1
-HT4: IC9.1 V-.1@9.915,110.442 V-.2@14.691,110.442 V-.3@12.303,112.829 V-.4@12.303,108.054 | length 23.6
  Top Layer w0.6: V-.3@12.303,112.829 9.915,110.442 12.303,108.054 14.691,110.442 26.464,110.442 IC9.1
ADCINA0: J3.20
ADCINA3: J3.18
ADCINA5: J1.6 U3.1 U3.2 | length 76
  Layer 1 w0.4: U3.2 U3.1
  Layer 2 w0.4: U3.2 84.35,167.11 84.35,98.244 J1.6
ADCINA9: J1.18
ADCINB0: J1.8 U3.6 U3.7 | length 65.3
  Layer 1 w0.4: U3.7 U3.6
  Layer 2 w0.4: U3.7 82.296,125.686 81.81,125.2 81.81,95.812 J1.8
ADCINB1: J1.12 U3.8 U3.9 | length 72.4
  Layer 1 w0.4: U3.8 U3.9
  Layer 2 w0.4: J1.12 87.122,93.396 87.122,127.508 89.916,130.302 U3.8
ADCINB2: J1.14 U4.1 U4.2 | length 87.9
  Layer 1 w0.4: J1.14 122.428,126.162 U4.1 U4.2
ADCINB6: C6.1 IC1.7 J3.8 | length 76.8
  Top Layer w0.3: IC1.7 67.247,86.423 v1(67.279,86.391) v1@67.31,86.36 ; v1@87.884,38.608 C6.1
  Layer 1 w0.254: v1(67.279,86.391) 75.184,78.486 75.184,37.322 80.248,32.258 81.864,32.258 J3.8
  Layer 1 w0.4: J3.8 87.63,35.484 v1(87.63,38.608)
ADCINC0: J1.16 U4.13 U4.14 | length 87.3
  Layer 2 w0.4: J1.16 113.538,114.732 113.538,127.254 114.808,128.524 U4.14 U4.13
ADCINC1: C12.1 IC5.7 J3.12 | length 43.2
  Top Layer w0.3: IC5.7 67.784,52.358 v1(67.818,52.324) ; v1@88.138,26.67 C12.1
  Layer 1 w0.254: v1(67.818,52.324) 67.818,39.608 80.363,27.063 81.979,27.063 J3.12
  Layer 1 w0.4: J3.12 86.645,25.908 87.407,26.67 v1(87.63,26.67)
ADCINC2: J1.10 U3.13 U3.14 | length 82.6
  Layer 1 w0.4: U3.13 U3.14
  Layer 2 w0.4: J1.10 85.128,93.942 85.128,164.376 U3.13
ADCINC3: C14.1 IC6.7 J3.14 | length 30.4
  Top Layer w0.3: IC6.7 65.119,35.306 v1(67.31,35.306) ; v1@88.138,21.082 C14.1
  Layer 1 w0.254: v1(67.31,35.306) 77.851,24.765 81.737,24.765 J3.14
  Layer 1 w0.4: J3.14 85.42,21.082 v1(87.63,21.082)
ADCINC5: C16.1 IC4.7 J3.16 | length 28.5
  Top Layer w0.3: IC4.7 67.558,18.294 v1(67.564,18.288) ; v1@88.138,15.494 C16.1@90.348,15.494
  Layer 1 w0.254: v1(67.564,18.288) 68.79,19.514 80.897,19.514 81.991,20.609 82.915,20.609 J3.16
  Layer 1 w0.4: J3.16 87.464,16.499 87.464,15.66 v1(87.63,15.494)
ADCINC14: C10.1 IC3.7 J3.10 | length 59.4
  Top Layer w0.3: IC3.7 67.105,69.391 v1(67.31,69.596) ; v1@87.884,32.766 C10.1
  Layer 1 w0.254: v1(67.31,69.596) 73.813,63.093 73.813,36.153 80.248,29.718 81.864,29.718 J3.10
  Layer 1 w0.4: J3.10 83.223,28.448 87.541,32.766 v1(87.63,32.766)
GND: "PWM + 12V.1" "PWM + 12V.3" "PWM + 12V.5" "PWM + 12V.7" "PWM + 12V.9" "PWM + 12V.11" "PWM + 12V.13" "PWM + 12V.15" "PWM A.4" "PWM B.4" "PWM C.4" "PWM D.4" "PWM E.4" "PWM F.4" "TP GND.1" C1.2 C2.1 C3.1 C4.1 C5.2 C6.2 C7.2 C8.2 C9.1 C10.2 C11.1 C12.2 C13.1 C14.2 C15.1 C16.2 DS1.2 GND.1 GND.2 GND.3 GND.4 IC1.5 IC3.5 IC4.5 IC5.5 IC6.5 J1.4 J2.2 J3.4 J4.2 J34.2 J34.3 P1.2 P2.3 R4.2 R11.2 R14.2 R17.2 R23.1 R30.1 R31.1 SW1.1 U1.4 U2.2 U3.11 U4.11 | length 107.1
  Top Layer w0.3: R4.2 v1(54.61,177.546) ; R14.2 v1(54.61,140.462) ; R11.2 v1(59.817,219.304) ; R17.2 v1@60.452,108.458 ; v1@61.976,202.438 C5.2 ; IC4.5 66.796,15.754 67.818,14.732 C13.1 ; IC6.5 67.29,32.786 67.818,32.258 C15.1 ; IC5.5 65.099,48.335 65.606,47.828 C9.1 ; IC3.5 67.515,66.851 67.818,66.548 C11.1 ; IC1.5 67.501,83.883 67.818,83.566 C4.1 ; C3.1 71.374,212.522 P1.2 ; P2.3 73.914,227.038 74.752,226.2 C8.2 74.752,222.737 79.265,218.224 79.561,218.224 80.086,217.699 C7.2@80.086,217.424 ; R23.1 v1@82.55,195.834 ; v1(90.602,224.917) DS1.2 ; C16.2 C14.2 C12.2 C10.2 C6.2 ; v1@105.918,162.56 R31.1 ; U4.11 118.514,167.282 123.231,167.282 124.651,165.862 R30.1 ; v1@119.507,223.469 C1.2 ; U2.2 133.845,212.179 C2.1
  other v1: 67.564,15.24 93.218,29.972 67.564,32.766 65.278,48.006 67.667,66.699 67.66,83.724 60.706,108.458 106.172,162.56 82.55,196.342 61.976,202.692 119.456,223.215
GND_E: "PWM A.5" "PWM A.6" "PWM B.5" "PWM B.6" "PWM C.5" "PWM C.6" "PWM D.5" "PWM D.6" "PWM E.5" "PWM E.6" "PWM F.5" "PWM F.6" U2.4 U2.5
IP+: I+.1@31.144,89.642 I+.2@35.92,89.642 I+.3@33.532,92.029 I+.4@33.532,87.254 R1.1 | length 21.5
  Top Layer w0.9: I+.4@33.532,87.254 31.144,89.642 33.532,92.029 35.92,89.642 38.061,87.5 R1.1
IP+2: I+.1@31.144,71.392 I+.2@35.92,71.392 I+.3@33.532,73.779 I+.4@33.532,69.004 R5.1 | length 21
  Top Layer w0.9: I+.4@33.532,69.004 31.144,71.392 33.532,73.779 35.92,71.392 36.271,71.392 37.195,70.468 R5.1
IP+3: I+.1@31.144,53.142 I+.2@35.92,53.142 I+.3@33.532,55.529 I+.4@33.532,50.754 R7.1 | length 20.8
  Top Layer w0.9: I+.3@33.532,55.529 31.144,53.142 33.532,50.754 35.92,53.142 46.146,53.142 R7.1
IP+4: I+.1@31.144,34.892 I+.2@35.92,34.892 I+.3@33.532,37.279 I+.4@33.532,32.504 R8.1 | length 21.3
  Top Layer w0.9: I+.3@33.532,37.279 31.144,34.892 33.532,32.504 35.92,34.892 37.431,36.403 R8.1
IP+5: I+.1@31.144,16.642 I+.2@35.92,16.642 I+.3@33.532,19.029 I+.4@33.532,14.254 R6.1 | length 21.8
  Top Layer w0.9: I+.3@33.532,19.029 31.144,16.642 33.532,14.254 35.92,16.642 38.649,19.371 R6.1
IP-: I-.1@9.915,89.642 I-.2@14.691,89.642 I-.3@12.303,92.029 I-.4@12.303,87.254 IC1.3 IC1.4 | length 61
  Top Layer w0.9: I-.2@14.691,89.642 12.303,92.029 9.915,89.642 12.303,87.254 16.753,82.804 40.386,82.804 41.465,83.883 IC1.4 IC1.3
IP-2: I-.1@9.915,71.392 I-.2@14.691,71.392 I-.3@12.303,73.779 I-.4@12.303,69.004 IC3.3 IC3.4 | length 61.6
  Top Layer w0.9: I-.2@14.691,71.392 12.303,73.779 9.915,71.392 12.303,69.004 16.791,64.516 40.386,64.516 42.721,66.851 IC3.4 IC3.3
IP-3: I-.1@9.915,53.142 I-.2@14.691,53.142 I-.3@12.303,55.529 I-.4@12.303,50.754 IC5.3 IC5.4 | length 62.1
  Top Layer w0.9: I-.2@14.691,53.142 12.303,55.529 9.915,53.142 12.303,50.754 16.829,46.228 40.188,46.228 43.778,49.818 IC5.4 IC5.3
IP-4: I-.1@9.915,34.892 I-.2@14.691,34.892 I-.3@12.303,37.279 I-.4@12.303,32.504 IC6.3 IC6.4 | length 62.4
  Top Layer w0.9: I-.2@14.691,34.892 12.303,37.279 9.915,34.892 12.303,32.504 22.36,32.504 26.67,28.194 54.632,28.194 59.224,32.786 IC6.4 IC6.3
IP-5: I-.1@9.915,16.642 I-.2@14.691,16.642 I-.3@12.303,19.029 I-.4@12.303,14.254 IC4.3 IC4.4 | length 63
  Top Layer w0.9: I-.2@14.691,16.642 12.303,19.029 9.915,16.642 12.303,14.254 16.651,9.906 35.376,9.906 41.224,15.754 IC4.4 IC4.3
NetC7_1: C7.1 L1.1 P2.1 | length 18.3
  Top Layer w0.3: P2.1 69.999,225.911 69.999,217.678 70.124,217.678 71.902,219.456 74.168,219.456 75.937,217.687 76.623,217.687 C7.1@76.886,217.424
NetD1_1: D1.1 U2.1 | length 8.5
  Top Layer w1: D1.1 121.134,215.238 121.653,214.719 U2.1
NetDS1_1: DS1.1 R32.2 | length 2.8
  Top Layer w0.3: DS1.1 98.679,224.917 R32.2
NetIC1_1: IC1.1 IC1.2 R1.2 | length 11.4
  Top Layer w0.9: R1.2 59.031,87.5 59.224,87.693 IC1.1 IC1.2
NetIC2_2: IC2.2 R2.2 | length 9.6
  Top Layer w0.6: R2.2 27.686,211.658 IC2.2
NetIC3_1: IC3.1 IC3.2 R5.2 | length 11.4
  Top Layer w0.9: R5.2 59.031,70.468 59.224,70.661 IC3.1 IC3.2
NetIC4_1: IC4.1 IC4.2 R6.2 | length 11.4
  Top Layer w1: R6.2 59.031,19.371 59.224,19.564 IC4.1 IC4.2
NetIC5_1: IC5.1 IC5.2 R7.2 | length 11.4
  Top Layer w0.9: R7.2 59.031,53.436 59.224,53.628 IC5.1 IC5.2
NetIC6_1: IC6.1 IC6.2 R8.2 | length 11.4
  Top Layer w0.9: R8.2 59.031,36.403 59.224,36.596 IC6.1 IC6.2
NetIC7_2: IC7.2 R9.2 | length 10
  Top Layer w0.6: R9.2 27.686,251.282 IC7.2
NetIC8_2: IC8.2 R13.2 | length 10.2
  Top Layer w0.6: R13.2 27.686,173.05 IC8.2
NetIC9_2: IC9.2 R16.2 | length 10.2
  Top Layer w0.6: R16.2 27.686,134.442 IC9.2
NetJ34_1: J34.1 SW1.3 | length 11.1
  Top Layer w1: J34.1 103.407,217.415 SW1.3
NetR3_1: R3.1 R12.2 U3.12 | length 22.3
  Top Layer w0.3: U3.12 90.15,166.858 90.15,167.38 95.652,172.881 99.544,172.881 99.781,173.118 99.781,174.552 99.544,174.789 99.448,174.789 98.552,175.685 R12.2 R3.1
NetR10_2: R10.2 R15.2 U3.3 | length 23.9
  Top Layer w0.3: R10.2 R15.2 73.427,176.685 73.827,176.285 73.827,175.106 72.477,175.106 71.923,174.552 71.923,173.118 75.053,169.988 78.932,169.988 U3.3 U3.3@82.296,166.637
NetR18_1: R18.1 R20.2 U3.5 | length 14.9
  Top Layer w0.3: R20.2 R18.1 81.181,160.429 U3.5
NetR19_1: R19.1 R21.1 U3.10 | length 14.4
  Top Layer w0.3: U3.10 97.162,161.544 98.277,160.429 R19.1 R21.1
NetR22_2: R22.2 R23.2 U1.3 | length 16.3
  Top Layer w0.3: R23.2 v1(85.217,190.853) R22.2
  Layer 1 w0.4: U1.3 85.217,184.023 v1(85.217,190.853)
NetR24_1: R24.1 R26.2 U4.12 | length 23.3
  Top Layer w0.3: R26.2 108.303,157.713 109.257,156.759 111.87,156.759 113.222,158.111 113.222,159.45 U4.12 118.514,157.33 123.149,157.33 124.269,156.21 R24.1
NetR25_2: R25.2 R27.2 U4.3 | length 17.4
  Top Layer w0.3: U4.3 126.083,161.036 R25.2 126.337,161.057 130.141,164.861 130.141,169.902 129.187,170.856 R27.2
NetR28_2: R28.2 R30.2 U4.5 | length 11.1
  Top Layer w0.3: U4.5 123.911,164.633 127.054,164.633 127.608,165.187 128.787,165.187 129.187,165.587 R30.2 R28.2
NetR29_2: R29.2 R31.2 U4.10 | length 9.3
  Top Layer w0.3: R31.2 R29.2@111.153,167.365 ; R29.2 R29.2@111.153,167.365 ; U4.10 112.677,166.116 111.828,166.965 111.553,166.965 R29.2@111.153,167.365
OFFSET: R12.1 R15.1 R18.2 R19.2 U1.1 U1.2 | length 77.9
  Top Layer w0.3: R18.2 73.251,157.48 v1(75.692,157.48) ; R15.1 74.427,173.835 ; v1(75.946,173.736) 75.847,173.835 74.427,173.835 ; v1@93.218,172.974 92.357,173.835 ; v1(94.996,157.734) 98.397,157.734 R19.2 ; R12.1 92.357,173.835 ; 74.427,173.835 78.244,177.652 78.244,179.59 U1.2 92.103,173.835 92.357,173.835
  Layer 1 w0.4: v1(75.692,157.48) 75.946,157.734 v1(75.946,173.736) ; U1.2 U1.1 ; v1(93.218,172.72) 93.218,159.512 v1@94.742,157.988
OFFSET-T: R26.1 U4.8 U4.9 | length 18.4
  Top Layer w0.3: R26.1 111.153,158.263 110.199,159.217 110.199,168.632 110.436,168.869 114.595,168.869 U4.9
  Layer 1 w0.4: U4.9 U4.8
OFFSETEN: R27.1 U4.6 U4.7 | length 6.9
  Top Layer w0.3: U4.7 123.444,172.212 R27.1
  Layer 1 w0.4: U4.6 U4.7
PWM1A: "PWM + 12V.12" "PWM D.2" J4.1 | length 86.6
  Layer 1 w0.4: J4.1 124.047,38.881 124.047,39.736 140.454,56.142 140.454,62.362 147.965,69.873 150.465,69.873
  Layer 2 w0.4: J4.1 124.99,39.824 130.61,39.824 155.702,14.732
PWM1B: "PWM + 12V.10" "PWM D.3" J4.3 | length 86.9
  Layer 1 w0.4: J4.3 125.098,37.392 127.544,37.392 142.748,52.596 142.748,58.115 153.527,68.894 153.527,69.725 153.675,69.873
  Layer 2 w0.4: J4.3 124.99,37.284 130.61,37.284 153.162,14.732
PWM2A: "PWM + 12V.4" "PWM F.2" J4.9 | length 56.4
  Layer 1 w0.4: J4.9 124.99,27.232 148.645,27.232 150.465,29.052
  Layer 2 w0.4: J4.9 124.99,29.664 130.61,29.664 145.542,14.732
PWM2B: "PWM + 12V.2" "PWM F.3" J4.11 | length 56.2
  Layer 1 w0.4: J4.11 125.098,24.584 149.329,24.584 153.675,28.93 153.675,29.052
  Layer 2 w0.4: J4.11 125.098,24.584 133.15,24.584 143.002,14.732
PWM3A: "PWM C.2" J2.9 | length 27.4
  Layer 1 w0.4: J2.9 124.99,90.732 149.712,90.732 150.161,90.283 150.465,90.283
PWM3B: "PWM C.3" J2.11 | length 31.3
  Layer 1 w0.4: J2.11 124.99,88.192 151.286,88.192 153.377,90.283 153.675,90.283
PWM4A: "PWM + 12V.8" "PWM E.2" J4.5 | length 69.9
  Layer 1 w0.4: J4.5 124.99,32.312 133.314,32.312 150.465,49.463
  Layer 2 w0.4: J4.5 124.99,34.744 130.61,34.744 150.622,14.732
PWM4B: "PWM + 12V.6" "PWM E.3" J4.7 | length 70.6
  Layer 1 w0.4: J4.7 124.99,29.772 132.515,29.772 132.588,29.845 134.057,29.845 153.675,49.463
  Layer 2 w0.4: J4.7 124.99,32.204 130.61,32.204 148.082,14.732
PWM5A: "PWM B.2" J2.5 | length 32.4
  Layer 1 w0.4: J2.5 125.098,98.352 138.123,98.352 150.465,110.694
PWM5B: "PWM B.3" J2.7 | length 37.6
  Layer 1 w0.4: J2.7 124.99,93.272 136.253,93.272 153.675,110.694
PWM6A: "PWM A.2" J2.1 | length 40.1
  Layer 1 w0.4: J2.1 124.047,102.381 124.047,103.236 146.264,125.452 146.264,126.903 150.465,131.104
PWM6B: "PWM A.3" J2.3 | length 45.6
  Layer 1 w0.4: J2.3 125.098,100.892 127.943,100.892 128.956,101.905 128.956,105.08 153.46,129.584 153.46,130.889 153.675,131.104
V1: IC2.3 R4.1 R10.1 | length 36.4
  Top Layer w0.3: IC2.3 48.895,177.597 R4.1 ; v1(67.564,189.23) 67.75,189.044 68.646,189.044 72.877,184.813 R10.1@73.044,184.813
  Layer 1 w0.4: IC2.3 51.026,189.23 v1(67.564,189.23)
V2: IC7.3 R11.1 R20.1 | length 68.4
  Top Layer w0.3: IC7.3 48.895,224.812 54.153,219.554 R11.1 54.102,219.253 v1(54.102,216.967) ; v1(69.85,170.942) 70.036,170.756 70.678,170.756 72.877,168.557 R20.1
  Layer 2 w0.4: v1(54.102,216.967) 54.102,186.69 v1(69.85,170.942)
V3: IC8.3 R3.2 R14.1 | length 83.6
  Top Layer w0.3: IC8.3 48.895,140.767 R14.1 ; R3.2 v1(98.552,187.96)
  Layer 2 w0.4: IC8.3@48.959,147.844 IC8.3 67.564,166.576 70.326,166.576 77.978,174.228 77.978,185.42 80.518,187.96 v1(98.552,187.96)
V4: IC9.3 R17.1 R21.2 | length 92.2
  Top Layer w0.3: v1@52.324,107.95 52.832,108.458 R17.1 R17.1@54.788,108.204 ; R21.2 v1(98.552,171.196)
  Layer 1 w0.4: v1(52.07,107.95) 50.8,109.22 IC9.3 98.552,158.877 v1(98.552,171.196)
pads on no net: IC1.6 IC3.6 IC4.6 IC5.6 IC6.6 J1.2 J1.3 J1.5 J1.7 J1.9 J1.11 J1.13 J1.15 J1.17 J1.19 J1.20 J2.4 J2.6 J2.8 J2.10 J2.12 J2.13 J2.14 J2.15 J2.16 J2.17 J2.18 J2.19 J2.20 J3.1 J3.2 J3.3 J3.5 J3.6 J3.7 J3.9 J3.11 J3.13 J3.15 J3.17 J3.19 J4.4 J4.6 J4.8 J4.10 J4.12 J4.13 J4.14 J4.15 J4.16 J4.17 J4.18 J4.19 J4.20 U1.5 U1.6 U1.7
copper on no net:
  other v2: 5.787,4.842 169.862,4.842 5.787,260.86 169.862,260.86

## Polygon pours and split planes (outlines as drawn)
+12VDC on Layer 2 "Layer 2-+12VDC" (solid, pour order 59): 106.172,206.502 118.745,199.873 148.59,181.356 148.59,26.162 154.94,26.162 156.972,24.13 156.972,13.462 162.306,13.462 162.052,13.716 162.052,26.67 154.94,33.782 154.94,187.96 122.885,210.058 114.529,216.408 109.728,216.408 102.108,210.058 72.644,210.058 72.644,206.502
-12V on Layer 2 "Layer 2--12V" (solid, pour order 51): 70.358,225.806 72.21,225.806 77.978,235.458 77.978,239.776 50.8,239.776 50.8,243.332 46.736,243.332 46.736,122.174 50.8,122.174 50.8,235.458 70.358,235.458
+12V on Layer 1 "Layer 1-+12V" (solid, pour order 54): 46.736,115.062 46.99,114.808 50.8,114.808 50.8,195.834 70.104,195.834 70.104,210.058 50.8,210.058 50.8,235.966 46.736,235.966
+3.3V on Top Layer "Top Layer-No Net" (solid, pour order 20): 64.262,7.874 141.732,7.874 141.732,211.074 64.868,211.074 64.868,169.575 64.868,116.297 53.594,116.297 53.594,102.362 64.262,102.362
GND on Bottom Layer "Bottom Layer-No Net" (solid, pour order 39): 53.594,103.886 53.848,103.632 63.246,103.632 63.246,0 162.306,0 162.306,13.208 156.21,13.208 156.21,248.412 68.834,248.412 46.99,248.412 46.99,171.45 63.246,171.45 63.246,145.034 53.594,145.034

## Silkscreen, mask and mechanical layers (free items; w line width, h text height)
Top Overlay:
  text "Sensor/PWM Tester Board" at 149.555,244.145 h1.52
  text "John Yang Ver 1.0 4/22/2024" at 150.063,235.255 h1.52

## Text inside footprints (layer, text, board x,y; h text height)
J34: Mechanical 13 "*" at 99.147,215.377 h1.27; Top Overlay "*" at 99.147,215.377 h1.27
"PWM A": Mechanical 13 "4" at 154.31,134.81 h1.27 r90; Mechanical 13 "2" at 151.1,134.81 h1.27 r90; Mechanical 13 "3" at 154.31,129.262 h1.27 r90; Mechanical 13 "1" at 151.1,129.262 h1.27 r90
"PWM B": Mechanical 13 "4" at 154.31,114.4 h1.27 r90; Mechanical 13 "2" at 151.1,114.4 h1.27 r90; Mechanical 13 "3" at 154.31,108.852 h1.27 r90; Mechanical 13 "1" at 151.1,108.852 h1.27 r90
"PWM C": Mechanical 13 "4" at 154.31,93.99 h1.27 r90; Mechanical 13 "2" at 151.1,93.99 h1.27 r90; Mechanical 13 "3" at 154.31,88.442 h1.27 r90; Mechanical 13 "1" at 151.1,88.442 h1.27 r90
"PWM D": Mechanical 13 "4" at 154.31,73.579 h1.27 r90; Mechanical 13 "2" at 151.1,73.579 h1.27 r90; Mechanical 13 "3" at 154.31,68.031 h1.27 r90; Mechanical 13 "1" at 151.1,68.031 h1.27 r90
"PWM E": Mechanical 13 "4" at 154.31,53.169 h1.27 r90; Mechanical 13 "2" at 151.1,53.169 h1.27 r90; Mechanical 13 "3" at 154.31,47.621 h1.27 r90; Mechanical 13 "1" at 151.1,47.621 h1.27 r90
"PWM F": Mechanical 13 "4" at 154.31,32.759 h1.27 r90; Mechanical 13 "2" at 151.1,32.759 h1.27 r90; Mechanical 13 "3" at 154.31,27.211 h1.27 r90; Mechanical 13 "1" at 151.1,27.211 h1.27 r90
U1: Mechanical 13 "*" at 82.486,185.547 h1.27; Top Overlay "*" at 81.978,187.071 h1.27
U3: Mechanical 13 "*" at 82.486,171.069 h1.27; Top Overlay "*" at 81.978,172.593 h1.27
U4: Mechanical 13 "*" at 122.237,156.591 h1.27 r180; Top Overlay "*" at 122.745,155.067 h1.27 r180